# EAGLE board finalPerryAmp (EAGLE 9.6.2)
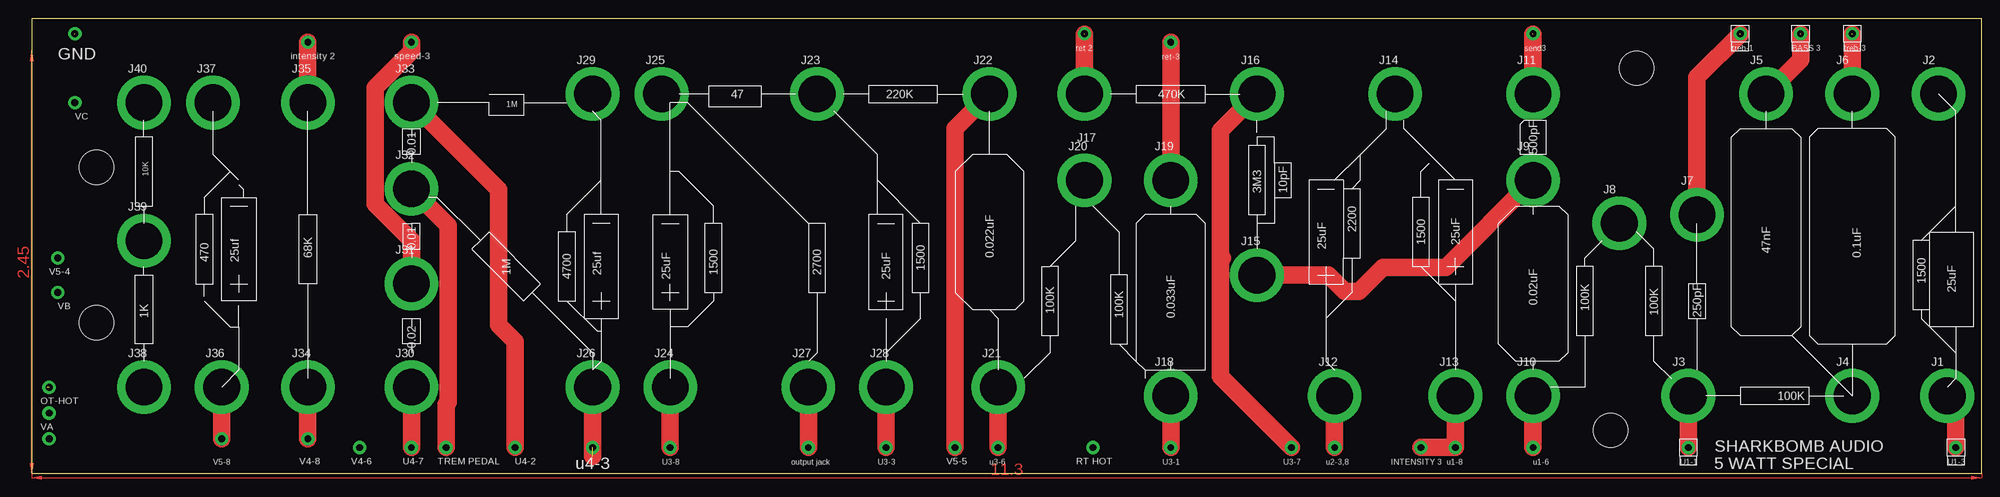
[diagram p0: board, top side]
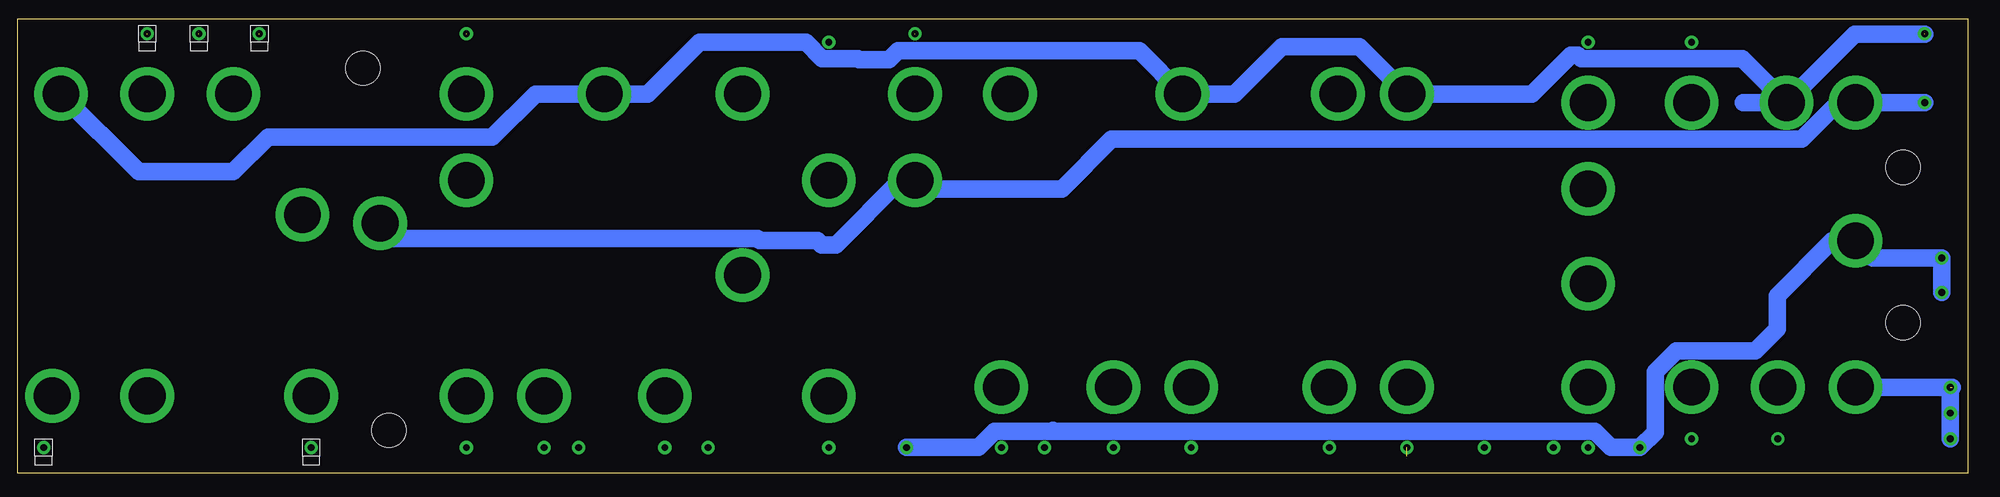
[diagram p1: board, bottom side, seen from below]

Size 287 x 66.98 mm. Coordinates in mm from the lower left corner, seen from the top.
Outline: 0,0 287,0 287,66.98 0,66.98 0,0
Copper layers (1*16): Top 0.035mm / dielectric 1.5mm / Bottom 0.035mm
Design rules "default": minimum track width 6mil, minimum drill 0.35mm, track to track 6mil, track to pad 6mil, pad to pad 6mil, via to via 6mil, smd to smd 6mil, copper to edge 40mil, drill to drill 6mil, minimum pad ring 10mil, minimum via ring 8mil, stop-mask expansion 4mil, vias tented up to drill 0mil, thermal gap 10mil

## Footprints (pad centres in the part's own frame; a part is rotated, then mirrored left to right if it is on the bottom)
KEYSTONE_575-4 = drill 5.4 pad 7.9: 1 0,0
PAD1 = drill 1.016 pad 1.93: 1 0,0
PAD2 = drill 1.016 pad 1.93: P$1 0,0
M6-HOLE = hole 5.08: 0,0

## Placement (x,y rotation side)
J1  575-4  [KEYSTONE_575-4]  281.94,11.43 0 top
J2  575-4  [KEYSTONE_575-4]  280.67,55.88 0 top
J3  575-4  [KEYSTONE_575-4]  243.84,11.43 0 top
J4  575-4  [KEYSTONE_575-4]  267.97,11.43 0 top
J5  575-4  [KEYSTONE_575-4]  255.27,55.88 0 top
J6  575-4  [KEYSTONE_575-4]  267.97,55.88 0 top
J7  575-4  [KEYSTONE_575-4]  245.11,38.1 0 top
J8  575-4  [KEYSTONE_575-4]  233.68,36.83 0 top
J9  575-4  [KEYSTONE_575-4]  220.98,43.18 0 top
J10  575-4  [KEYSTONE_575-4]  220.98,11.43 0 top
J11  575-4  [KEYSTONE_575-4]  220.98,55.88 0 top
J12  575-4  [KEYSTONE_575-4]  191.77,11.43 0 top
J13  575-4  [KEYSTONE_575-4]  209.55,11.43 0 top
J14  575-4  [KEYSTONE_575-4]  200.66,55.88 0 top
J15  575-4  [KEYSTONE_575-4]  180.34,29.21 0 top
J16  575-4  [KEYSTONE_575-4]  180.34,55.88 0 top
J17  575-4  [KEYSTONE_575-4]  154.94,55.88 0 top
J18  575-4  [KEYSTONE_575-4]  167.64,11.43 0 top
J19  575-4  [KEYSTONE_575-4]  167.64,43.18 0 top
J20  575-4  [KEYSTONE_575-4]  154.94,43.18 0 top
J21  575-4  [KEYSTONE_575-4]  142.24,12.7 0 top
J22  575-4  [KEYSTONE_575-4]  140.97,55.88 0 top
J23  575-4  [KEYSTONE_575-4]  115.57,55.88 0 top
J24  575-4  [KEYSTONE_575-4]  93.98,12.7 0 top
J25  575-4  [KEYSTONE_575-4]  92.71,55.88 0 top
J26  575-4  [KEYSTONE_575-4]  82.55,12.7 0 top
J27  575-4  [KEYSTONE_575-4]  114.3,12.7 0 top
J28  575-4  [KEYSTONE_575-4]  125.73,12.7 0 top
J29  575-4  [KEYSTONE_575-4]  82.55,55.88 0 top
J30  575-4  [KEYSTONE_575-4]  55.88,12.7 0 top
J31  575-4  [KEYSTONE_575-4]  55.88,27.94 0 top
J32  575-4  [KEYSTONE_575-4]  55.88,41.91 0 top
J33  575-4  [KEYSTONE_575-4]  55.88,54.61 0 top
J34  575-4  [KEYSTONE_575-4]  40.64,12.7 0 top
J35  575-4  [KEYSTONE_575-4]  40.64,54.61 0 top
J36  575-4  [KEYSTONE_575-4]  27.94,12.7 0 top
J37  575-4  [KEYSTONE_575-4]  26.67,54.61 0 top
J38  575-4  [KEYSTONE_575-4]  16.51,12.7 0 top
J39  575-4  [KEYSTONE_575-4]  16.51,34.29 0 top
J40  575-4  [KEYSTONE_575-4]  16.51,54.61 0 top
U$1  PADS.RND_LBL  [PAD1]  267.97,64.77 0 top
U$2  PADS.RND_LBL  [PAD1]  260.35,64.77 0 top
U$3  PADS.RND_LBL  [PAD1]  251.46,64.77 0 top
U$4  PADS.RND_NL  [PAD2]  220.98,64.77 0 top
U$5  PADS.RND_LBL  [PAD1]  283.21,3.81 0 top
U$6  PADS.RND_LBL  [PAD1]  243.84,3.81 0 top
U$7  PADS.RND_NL  [PAD2]  220.98,3.81 0 top
U$8  PADS.RND_NL  [PAD2]  191.77,3.81 0 top
U$9  PADS.RND_NL  [PAD2]  209.55,3.81 0 top
U$10  PADS.RND_NL  [PAD2]  154.94,64.77 0 top
U$11  PADS.RND_NL  [PAD2]  185.42,3.81 0 top
U$12  PADS.RND_NL  [PAD2]  167.64,3.81 0 top
U$13  PADS.RND_NL  [PAD2]  167.64,63.5 0 top
U$14  PADS.RND_NL  [PAD2]  142.24,3.81 0 top
U$15  PADS.RND_NL  [PAD2]  93.98,3.81 0 top
U$16  PADS.RND_NL  [PAD2]  114.3,3.81 0 top
U$17  PADS.RND_NL  [PAD2]  125.73,3.81 0 top
U$18  PADS.RND_NL  [PAD2]  82.55,3.81 0 top
U$19  PADS.RND_NL  [PAD2]  60.96,3.81 0 top
U$20  PADS.RND_NL  [PAD2]  71.12,3.81 0 top
U$21  PADS.RND_NL  [PAD2]  55.88,63.5 0 top
U$22  PADS.RND_NL  [PAD2]  55.88,3.81 0 top
U$23  PADS.RND_NL  [PAD2]  40.64,5.08 0 top
U$24  PADS.RND_NL  [PAD2]  40.64,63.5 0 top
U$25  PADS.RND_NL  [PAD2]  204.47,3.81 0 top
U$26  PADS.RND_NL  [PAD2]  27.94,5.08 0 top
U$27  PADS.RND_NL  [PAD2]  135.89,3.81 0 top
U$28  PADS.RND_NL  [PAD2]  2.54,12.7 0 top
U$29  PADS.RND_NL  [PAD2]  2.54,8.89 0 top
U$30  PADS.RND_NL  [PAD2]  3.81,31.75 0 top
U$31  PADS.RND_NL  [PAD2]  6.35,54.61 0 top
U$32  PADS.RND_NL  [PAD2]  3.81,26.67 0 top
U$33  PADS.RND_NL  [PAD2]  156.21,3.81 0 top
U$34  PADS.RND_NL  [PAD2]  48.26,3.81 0 top
U$35  PADS.RND_NL  [PAD2]  6.35,64.77 0 top
U$36  [M6-HOLE]  9.53,22.23 0 top
U$37  [M6-HOLE]  9.53,45.08 0 top
U$38  [M6-HOLE]  236.22,59.69 0 top
U$39  PADS.RND_NL  [PAD2]  2.54,5.08 0 top
U$40  [M6-HOLE]  232.41,6.35 0 top

## Library data of the parts
J1-J40 = 575-4; AVAILABILITY: In Stock; DESCRIPTION: Banana Jack- Non-Insulated .218 Length; MF: Keystone Electronics; MP: 575-4; PACKAGE: None; PRICE: None; PURCHASE-URL: https://pricing.snapeda.com/search/part/575-4/?ref=eda
U$1-U$35 U$39 = supply pins
U$36-U$38 U$40 = amp library

## Nets
A: J9.1 J15.1
GND: J2.1 J14.1 J23.1 J29.1 J37.1 U$35.P$1
N$1: J1.1 U$5.1
N$2: J10.1 U$7.P$1
N$3: J4.1
N$4: J3.1 U$6.1
N$5: J5.1 U$2.1
N$6: J6.1 U$1.1
N$7: J7.1 U$3.1
N$8: J21.1 U$14.P$1
N$9: J18.1 U$12.P$1
N$10: J11.1 U$4.P$1
N$11: J12.1 U$8.P$1
N$12: J16.1 U$11.P$1
N$13: J17.1 U$10.P$1
N$14: J13.1 U$9.P$1 U$25.P$1
N$15: J19.1 U$13.P$1
N$16: J22.1 U$27.P$1
N$17: J25.1
N$18: J24.1 U$15.P$1
N$19: J31.1 U$21.P$1
N$20: J26.1 U$18.P$1
N$21: J27.1 U$16.P$1
N$22: J28.1 U$17.P$1
N$23: J32.1 U$19.P$1
N$24: J30.1 U$22.P$1
N$25: J33.1 U$20.P$1
N$26: J34.1 U$23.P$1
N$27: J35.1 U$24.P$1
N$28: J36.1 U$26.P$1
N$29: J38.1 U$28.P$1 U$29.P$1 U$39.P$1
N$31: J39.1 U$30.P$1 U$32.P$1 U$33.P$1 U$34.P$1
VC: J8.1 J20.1 J40.1 U$31.P$1

## Tracks (layer width: path | path; a pad name or v marks a point on that pad's centre or on a via)
A
  Top 2.54: J15.1 190.88,29.21 193.31,26.79 195.31,26.79 198.89,30.36 208.16,30.36 J9.1
GND  (1 unrouted)
  Bottom 2.54: J2.1 269.24,44.45 255.27,44.45 250.19,49.53 217.17,49.53 210.82,55.88 J14.1 194.31,55.88 186.69,63.5 171.02,63.5 168.63,61.11 163.35,61.11 163.19,60.96 158.75,60.96 157.48,62.23 121.92,62.23 J23.1 107.95,55.88 100.97,62.87 89.53,62.87 J29.1 64.14,55.88 58.42,61.59 57.35,61.59 56.87,61.11 33.17,61.11 J37.1 | J37.1 33.04,54.61 | J37.1 24.11,54.61 | J37.1 16.59,64.69 6.35,64.69
N$1
  Top 2.54: J1.1 283.21,10.16 U$5.1
N$2
  Top 2.54: J10.1 U$7.P$1
N$4
  Top 2.54: J3.1 U$6.1
N$5  (1 unrouted)
  Top 2.54: J5.1 260.35,60.96 260.35,64.69
N$6  (1 unrouted)
  Top 2.54: J6.1 267.97,64.69
N$7  (1 unrouted)
  Top 2.54: J7.1 245.11,58.34 251.46,64.69
N$8
  Top 2.54: J21.1 U$14.P$1
N$9
  Top 2.54: J18.1 U$12.P$1
N$10  (1 unrouted)
  Top 2.54: J11.1 220.98,64.69
N$11
  Top 2.54: J12.1 U$8.P$1
N$12
  Top 2.54: 175.26,31.73 174.97,31.43 | 174.97,31.43 174.97,14.26 U$11.P$1 | 174.97,31.43 174.97,50.51 J16.1
N$13  (1 unrouted)
  Top 2.54: J17.1 154.94,64.69
N$14
  Top 2.54: J13.1 U$9.P$1 U$25.P$1
N$15
  Top 2.54: J19.1 U$13.P$1
N$16
  Top 2.54: U$27.P$1 135.89,50.8 J22.1
N$18
  Top 2.54: J24.1 U$15.P$1
N$19
  Top 2.54: U$21.P$1 55.88,62.21 50.51,56.83 50.51,39.68 55.88,34.31 J31.1
N$20  (1 unrouted)
  Top 2.54: J26.1 82.55,2.54
N$21
  Top 2.54: J27.1 U$16.P$1
N$22
  Top 2.54: J28.1 U$17.P$1
N$23
  Top 2.54: U$19.P$1 60.96,10.18 61.25,10.47 61.25,36.54 J32.1
N$24
  Top 2.54: J30.1 U$22.P$1
N$25
  Top 2.54: U$20.P$1 71.12,19.43 68.7,21.86 68.7,41.79 J33.1
N$26
  Top 2.54: J34.1 U$23.P$1
N$27
  Top 2.54: J35.1 U$24.P$1
N$28
  Top 2.54: J36.1 U$26.P$1
N$29  (1 unrouted)
  Bottom 2.54: J38.1 2.29,12.7 | U$28.P$1 U$29.P$1 U$39.P$1
N$31
  Bottom 2.54: U$32.P$1 U$30.P$1 13.97,31.75 J39.1 19.94,34.29 28.06,26.17 28.06,21.27 31.26,18.07 42.87,18.07 46.01,14.93 46.01,6.06 U$34.P$1 52.5,3.81 54.89,6.2 134.47,6.2 | 134.62,6.35 134.47,6.2 | U$33.P$1 145.62,3.81 143.23,6.2 134.47,6.2
VC
  Bottom 2.54: J8.1 231.43,34.58 178.12,34.58 177.82,34.29 169.29,34.29 168.68,33.68 166.6,33.68 157.1,43.18 J20.1 156.21,41.91 133.35,41.91 126.02,49.24 24.45,49.24 19.07,54.61 J40.1 U$31.P$1
(copper drawn outside any net)
  shapes: Top area x2

## Text on the board
tNames: ret 2 | send3 | treb-1 | BASS 3 | treb-3 | GND | intensity 2 | speed-3 | ret-3 | 47 | 220K | 470K | 1M | VC | 0.01 | 500pF | 10K | 3M3 | 10pF | 2200 | 1500 | 25uF | 0.01 | 25uF | 47nF | 68K | 0.022uF | 0.1uF | 470 | 25uf | 1500 | V5-4 | 1M | 4700 | 25uf | 25uF | 1500 | 2700 | 25uF | 100K | 100K | 250pF | 1500 | 25uF | 0.02uF | VB | 100K | 1K | 100K | 0.033uF | 0.02 | 100K | OT-HOT | VA | SHARKBOMB AUDIO | V5-8 | V4-8 | V4-6 | U4-7 | TREM PEDAL | U4-2 | U3-8 | output jack | U3-3 | V5-5 | u3-6 | RT HOT | U3-1 | U3-7 | u2-3,8 | INTENSITY 3 | u1-8 | u1-6 | U1-1 | U1-3 | u4-3 | 5 WATT SPECIAL